# EAGLE board NOVA_AT85_NAVLIGHTS_CNC (EAGLE 6.5.0)
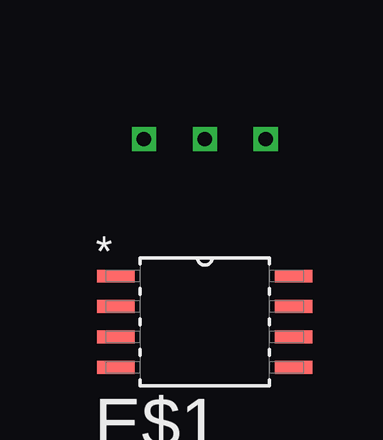
[diagram p0: board, top side]
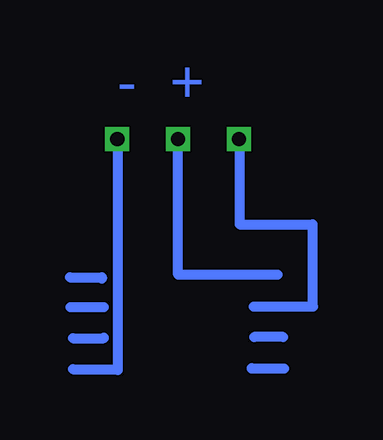
[diagram p1: board, bottom side, seen from below]

No outline drawn. Coordinates in mm, seen from the top.
Copper layers (1*16): Top 0.035mm / dielectric 1.5mm / Bottom 0.035mm
Design rules "default": minimum track width 10mil, minimum drill 24mil, track to track 8mil, track to pad 8mil, pad to pad 8mil, via to via 8mil, smd to smd 8mil, copper to edge 40mil, drill to drill 8mil, minimum pad ring 10mil, minimum via ring 8mil, stop-mask expansion 4mil, vias tented up to drill 0mil, thermal gap 10mil

## Footprints (pad centres in the part's own frame; a part is rotated, then mirrored left to right if it is on the bottom)
SOIC127P798X216-8N = smd 1.549 x 0.533: 1 -3.708,1.905; 2 -3.708,0.635; 3 -3.708,-0.635; 4 -3.708,-1.905; 5 3.708,-1.905; 6 3.708,-0.635; 7 3.708,0.635; 8 3.708,1.905

## Placement (x,y rotation side)
E$1  [SOIC127P798X216-8N]  43.18,73.66 0 top

## Library data of the parts
E$1 = Atmel_By_element14_Batch_1-00

## Tracks (layer width: path | path; a pad name or v marks a point on that pad's centre or on a via)
S$1
  Bottom 0.406: 40.03,74.3 37.54,74.3
S$2  (via drill 0.6)
  other vias: 40.64,81.28
S$3
  Bottom 0.406: 40.62,81.25 40.62,77.72 37.57,77.72 37.57,74.32
S$4  (via drill 0.6)
  Bottom 0.406: 43.18,75.69 v43.18,81.28
S$5
  Bottom 0.406: 39.01,75.62 43.18,75.62 43.18,75.67
S$6
  Bottom 0.406: 47.57,72.97 46.28,72.97 46.28,73
S$7  (via drill 0.6)
  Bottom 0.406: v45.72,81.28 45.7,81.28 45.7,71.68 | 45.7,71.68 45.7,71.65 | 47.57,71.68 45.7,71.68
S$8
  Bottom 0.406: 47.68,74.27 46.28,74.27
S$9
  Bottom 0.406: 47.7,75.51 46.35,75.51 46.35,75.46
S$10
  Bottom 0.406: 38.79,73.03 40.01,73.03
S$11
  Bottom 0.406: 38.76,71.7 40.11,71.7 40.11,71.73

## Text on the board
Bottom: - +